# Altium PCB PCB.PcbDoc
Units mil, origin at the board's own origin, x right, y up, seen from the top; angles counter-clockwise.
Board outline 1875 x 1625 mil, 2 copper layers (Top Layer, Bottom Layer); 9 components, 10 nets, 52 pads, 0 vias.
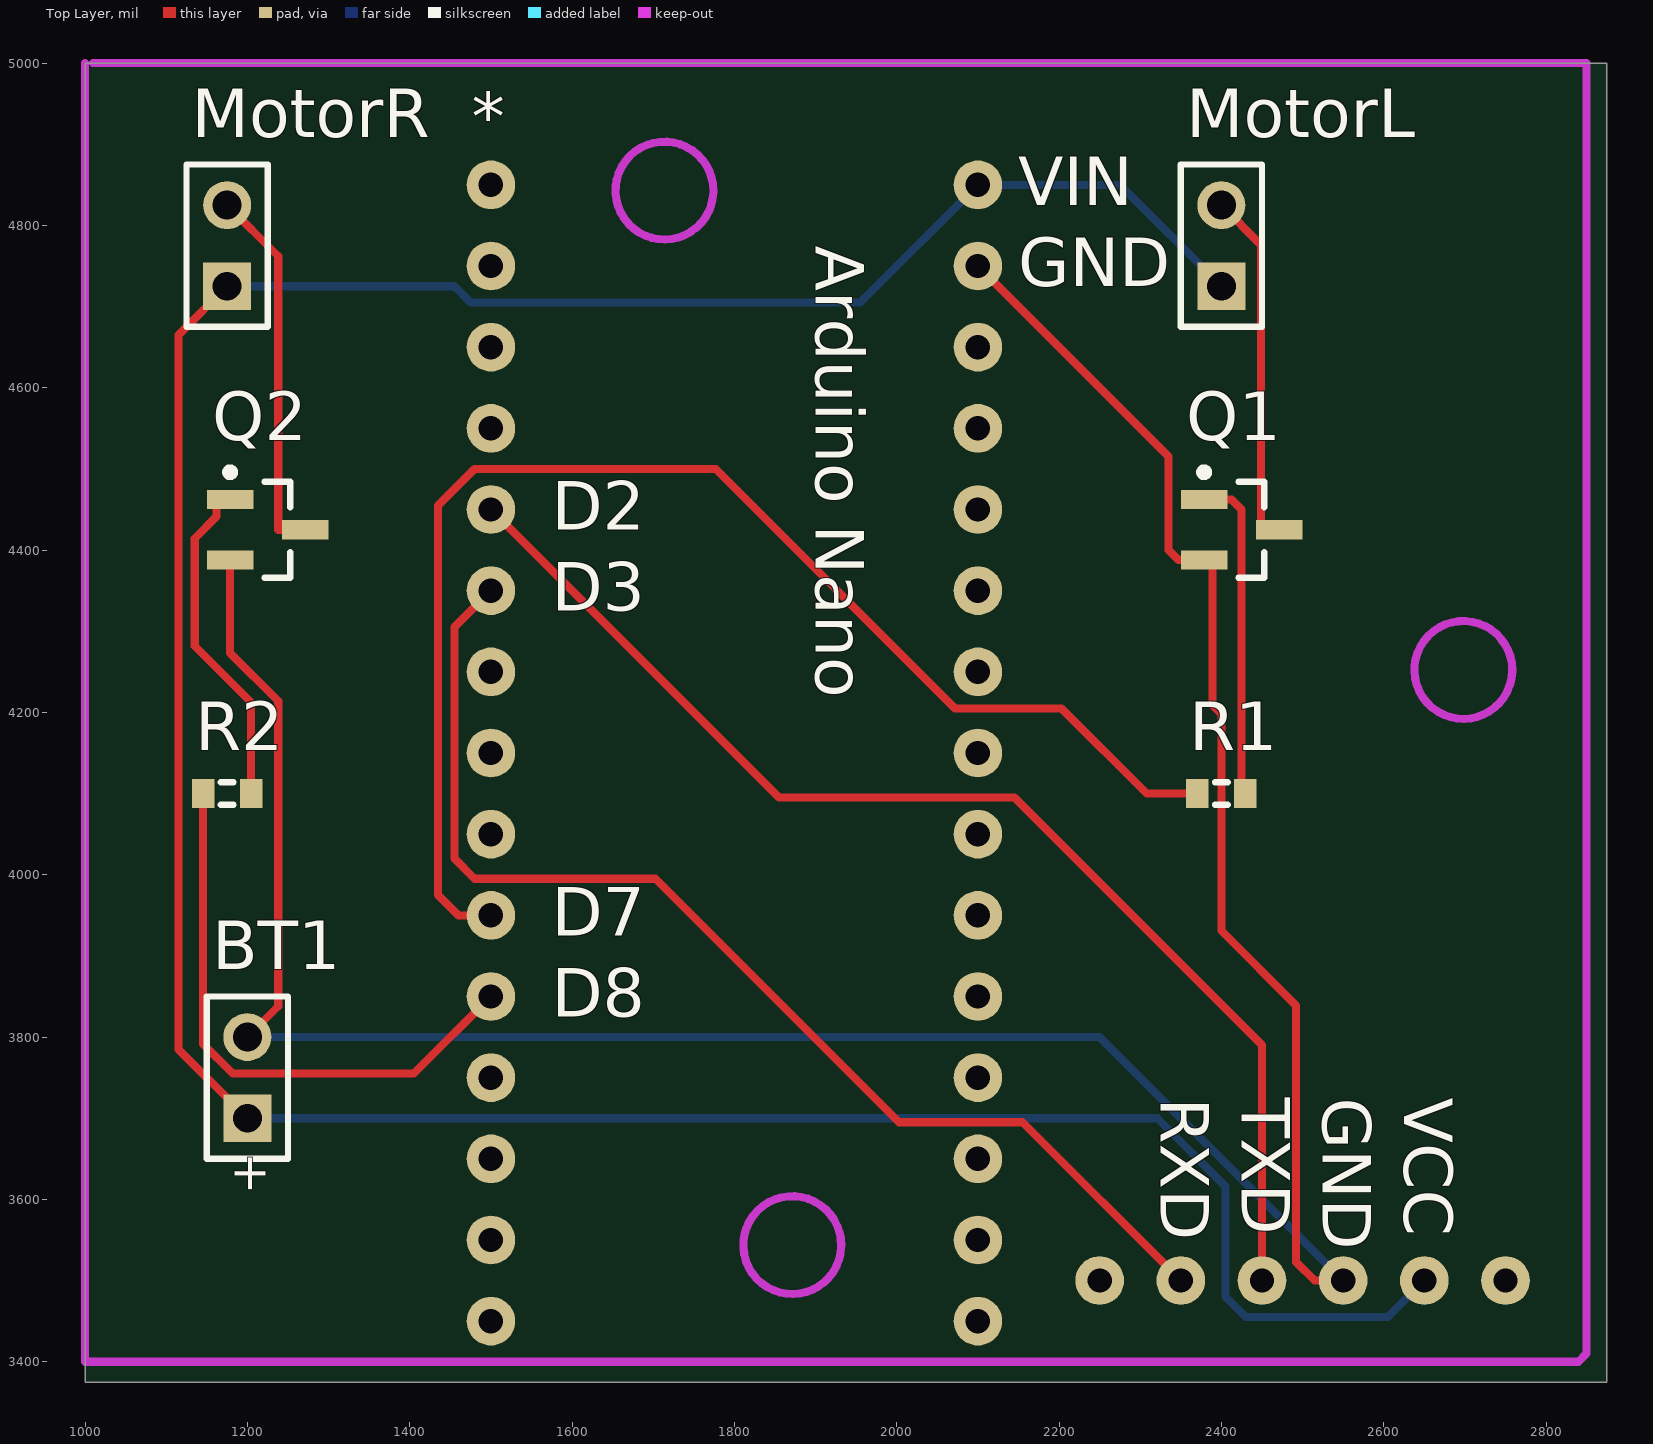
[diagram p0: Top Layer view]
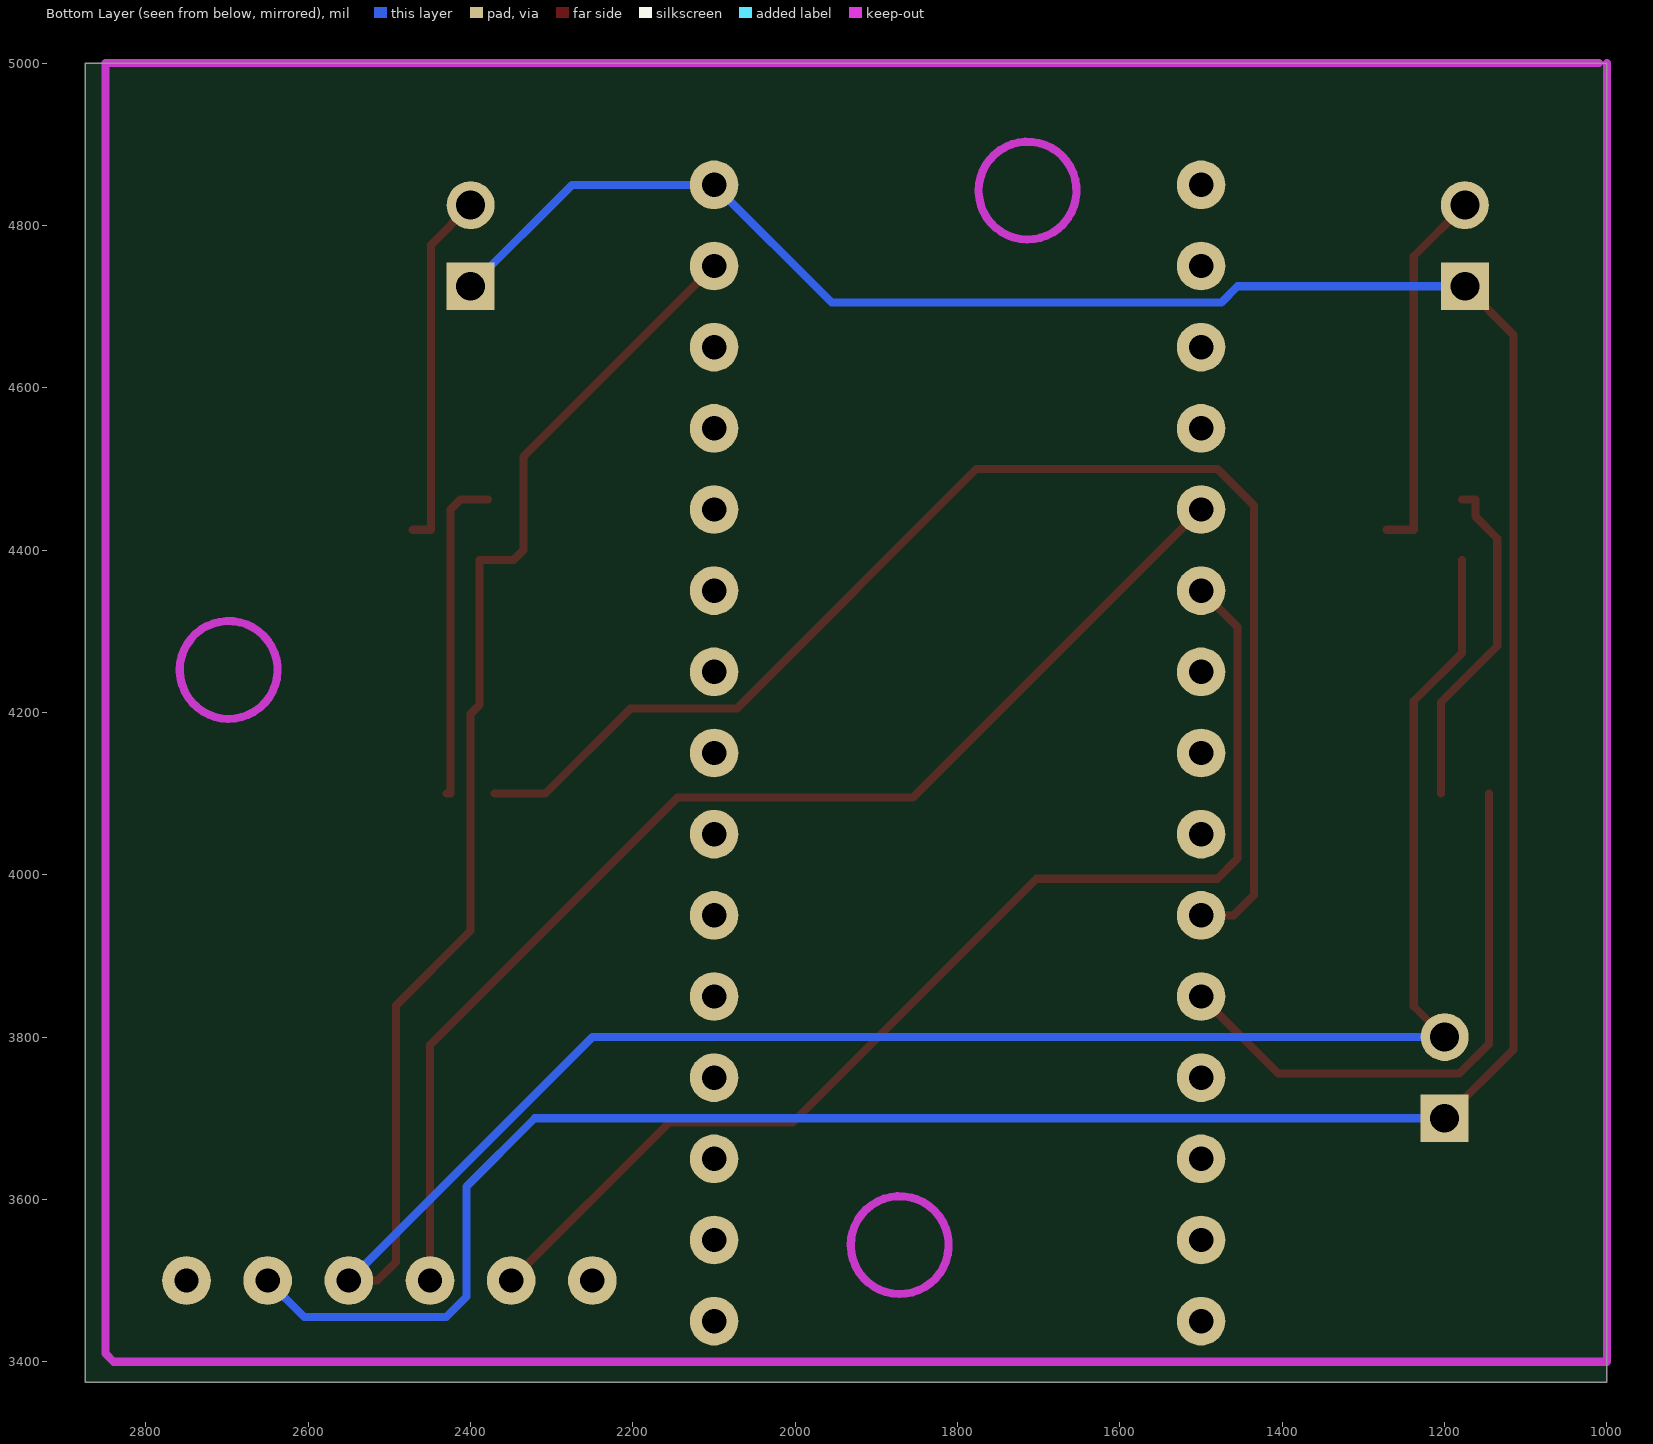
[diagram p1: Bottom Layer view, seen from below]

## Layer stack, top to bottom
Top Solder: solder mask 0.4, Solder Resist, Dk 3.5
Top Layer: signal copper 1.4
Dielectric 1: dielectric 12.6, FR-4, Dk 4.8
Bottom Layer: signal copper 1.4
Bottom Solder: solder mask 0.4, Solder Resist, Dk 3.5

## Board outline
1000,5000 1000,3375 2875,3375 2875,5000

## Design rules (kind name [scope] priority, off if disabled: settings)
Clearance [All] p1: gap=10
PolygonConnect [All] p1: connectstyle=Relief reliefconductorwidth=10 reliefentries=4 polygonreliefangle="90 Angle" airgapwidth=10
RoomDefinition main [InComponentClass('main')] p1: confinementstyle=ConfineIn formatcopy=TRUE lockcomponents=FALSE outline 0,0 2000,0 2000,1000 0,1000
RoutingVias [All] p1: holewidth=28 width=50 viastyle="Through Hole" minholewidth=28 minwidth=50 maxholewidth=28 maxwidth=50
SolderMaskExpansion [All] p1: expansion=4
Width [All] p1: maxlimit=10 minlimit=10 preferedwidth=10
30 further rules are at their usual default settings.

## Components (designator, comment, footprint, x,y, rotation, side; value= is the part's Value field where it differs from the comment)
* "arduinoNano" arduinoNano 1500,4850 r0 top
BT1 "Battery" BAT-2 1200,3750 r90 top
MotorL "Header 2" HDR1X2 2400,4725 r90 top
MotorR "Header 2" HDR1X2 1175,4725 r90 top
Q1 "QNPN" SOT-23_M 2425,4425 r0 top
Q2 "QNPN" SOT-23_M 1225,4425 r0 top
R1 "Res3" J1-0603 2400,4100 r0 top
R2 "Res3" J1-0603 1175,4100 r0 top
? "BT Module" HC-05 2750,3500 r270 top

## Footprints (in the part's own frame and the unit in brackets; to place one, negate y for a bottom-side part, rotate by r counter-clockwise, add the part's x,y. Pads: shape width x height; smd on the part's side, far side on the other; paste and mask are expansions set on the pad)
arduinoNano [mil]
  round 60 hole 30: 0(0,0) 1(0,-100) 2(0,-200) 3(0,-300) 4(0,-400) 5(0,-500) 6(0,-600) 7(0,-700) 8(0,-800) 9(0,-900) 10(0,-1000) 11(0,-1100) 12(0,-1200) 13(0,-1300) 14(0,-1400) 15(600,-1400) 16(600,-1300) 17(600,-1200) 18(600,-1100) 19(600,-1000) 20(600,-900) 21(600,-800) 22(600,-700) 23(600,-600) 24(600,-500) 25(600,-400) 26(600,-300) 27(600,-200) 28(600,-100) 29(600,0)
BAT-2 [mm] "Battery; 2 Leads"
  rect 1.5x1.5 hole 0.9: 1(-1.27,0)
  round 1.5 hole 0.9: 2(1.27,0)
  silkscreen extent -2.54,-1.27 2.54,1.27
HC-05 [mil]
  round 60 hole 30: 0(0,0) 1(0,-100) 2(0,-200) 3(0,-300) 4(0,-400) 5(0,-500)
HDR1X2 [mm] "Connector; Header; 2 Position"
  rect 1.5x1.5 hole 0.9: 1(0,0)
  round 1.5 hole 0.9: 2(2.54,0)
  silkscreen extent -1.27,-1.27 3.81,1.27
J1-0603 [mm] "Chip Resistor, Body 1.6x0.8mm, IPC High Density"
  rect 0.7x0.9 smd: 1(-0.75,0) 2(0.75,0)
  silkscreen extent -0.2,-0.35 0.2,0.35, body extent -0.85,-0.48 0.85,0.48, height 0.9
SOT-23_M [mm] "SOT23, 3-Leads, Body 2.9x1.3mm, Pitch 0.95mm, Lead Span 2.5mm, IPC Low Density"
  rect 1.45x0.6 smd: 1(-1.175,0.95) 2(-1.175,-0.95) 3(1.175,0)
  silkscreen extent -1.3,-1.5 0.7,1.92, body extent -0.7,-1.5 0.7,1.5, height 1.1

## Part data
BT1: "Multicell Battery"
MotorL MotorR: "Header, 2-Pin"
Q1 Q2: "NPN Bipolar Transistor"
R1 R2: "Resistor"
?: library part HC-05

## Nets (pads, with @x,y where several pads share a name; then routed paths per layer and width w, separated by ;. In a path a pad name is that pad's centre, name@x,y a point inside that pad or via, vN(x,y) a via of type N, cw(c..) or ccw(c..) an arc to the next point about the centre after c; other vN are vias at no path point)
GND: *.28 ?.2 BT1.2 Q1.2 Q2.2 | length 3583.5
  Top Layer w10: Q2.2 1178.74,4273.26 1238,4214 1238,3838 BT1.2 ; *.28 2334.8,4515.2 2334.8,4400 2347.21,4387.6 Q1.2 2389,4387.6 2389,4209 2400,4198 2400,3931 2492,3839 2492,3523 2515,3500 ?.2
  Bottom Layer w10: BT1.2 2250,3800 ?.2
Net*_4: *.4 ?.3 | length 1513.4
  Top Layer w10: *.4 1855,4095 2145,4095 2450,3790 ?.3
Net*_5: *.5 ?.4 | length 1459
  Top Layer w10: *.5 1455,4305 1455,4020 1480,3995 1703,3995 2003,3695 2155,3695 ?.4
Net*_9: *.9 R1.1 | length 1675.2
  Top Layer w10: *.9 1460,3950 1435,3975 1435,4455 1480,4500 1777,4500 2072,4205 2203,4205 2308,4100 R1.1
Net*_10: *.10 R2.1 | length 717.5
  Top Layer w10: R2.1 1145.47,3791.53 1182,3755 1405,3755 *.10
NetMotorL_2: MotorL.2 Q1.3 | length 442.6
  Top Layer w10: MotorL.2 2449,4776 2449,4425 Q1.3
NetMotorR_2: MotorR.2 Q2.3 | length 459.4
  Top Layer w10: MotorR.2 1238,4762 1238,4425 Q2.3
NetQ1_2: Q1.1 R1.2 | length 405.9
  Top Layer w10: Q1.1 2412.6,4462.4 2425,4450 2425,4100 R1.2
NetQ2_2: Q2.1 R2.2 | length 419
  Top Layer w10: Q2.1 1162,4462.4 1162,4441.21 1135.2,4414.41 1135.2,4281.8 1204.53,4212.47 R2.2
VCC: *.29 ?.1 BT1.1 MotorL.1 MotorR.1 | length 4079.8
  Top Layer w10: MotorR.1 1115.2,4665.2 1115.2,3784.8 BT1.1
  Bottom Layer w10: MotorR.1 1455,4725 1475,4705 1955,4705 *.29 2275,4850 MotorL.1 ; BT1.1 2321,3700 2405,3616 2405,3480 2430,3455 2605,3455 ?.1
pads on no net: *.0 *.1 *.2 *.3 *.6 *.7 *.8 *.11 *.12 *.13 *.14 *.15 *.16 *.17 *.18 *.19 *.20 *.21 *.22 *.23 *.24 *.25 *.26 *.27 ?.0 ?.5

## Keep-outs
Keep-Out Layer:
  lines w10: 1000,5000 1000,3400 2840,3400 2850,3410 2850,5000 1010,5000 ; 1774.09,4841.01 cw(c1713.83,4842.85) 1774.11,4842.52 ; 1931.57,3541.8 cw(c1871.31,3543.64) 1931.59,3543.31 ; 2758.34,4250.46 cw(c2698.08,4252.3) 2758.36,4251.97

## Silkscreen, mask and mechanical layers (free items; w line width, h text height)
Top Overlay:
  text "VIN" at 2150,4825 h60
  text "Arduino Nano" at 1900,4775 h60 r270
  text "GND" at 2150,4725 h60
  text "D2" at 1575,4425 h60
  text "D3" at 1575,4325 h60
  text "D7" at 1575,3925 h60
  text "D8" at 1575,3825 h60
  text "RXD" at 2325,3725 h60 r270
  text "TXD" at 2425,3725 h60 r270
  text "GND" at 2525,3725 h60 r270
  text "VCC" at 2625,3725 h60 r270

## Text inside footprints (layer, text, board x,y; h text height)
BT1: Top Overlay "+" at 1222.72,3605.51 h45.28 r90